# Altium PCB LEDmatrix.PcbDoc
Units mm, origin at the board's own origin, x right, y up, seen from the top; angles counter-clockwise.
Board outline 64.13 x 65.66 mm, 2 copper layers (Top Layer, Bottom Layer); 66 components, 68 nets, 194 pads, 47 vias.
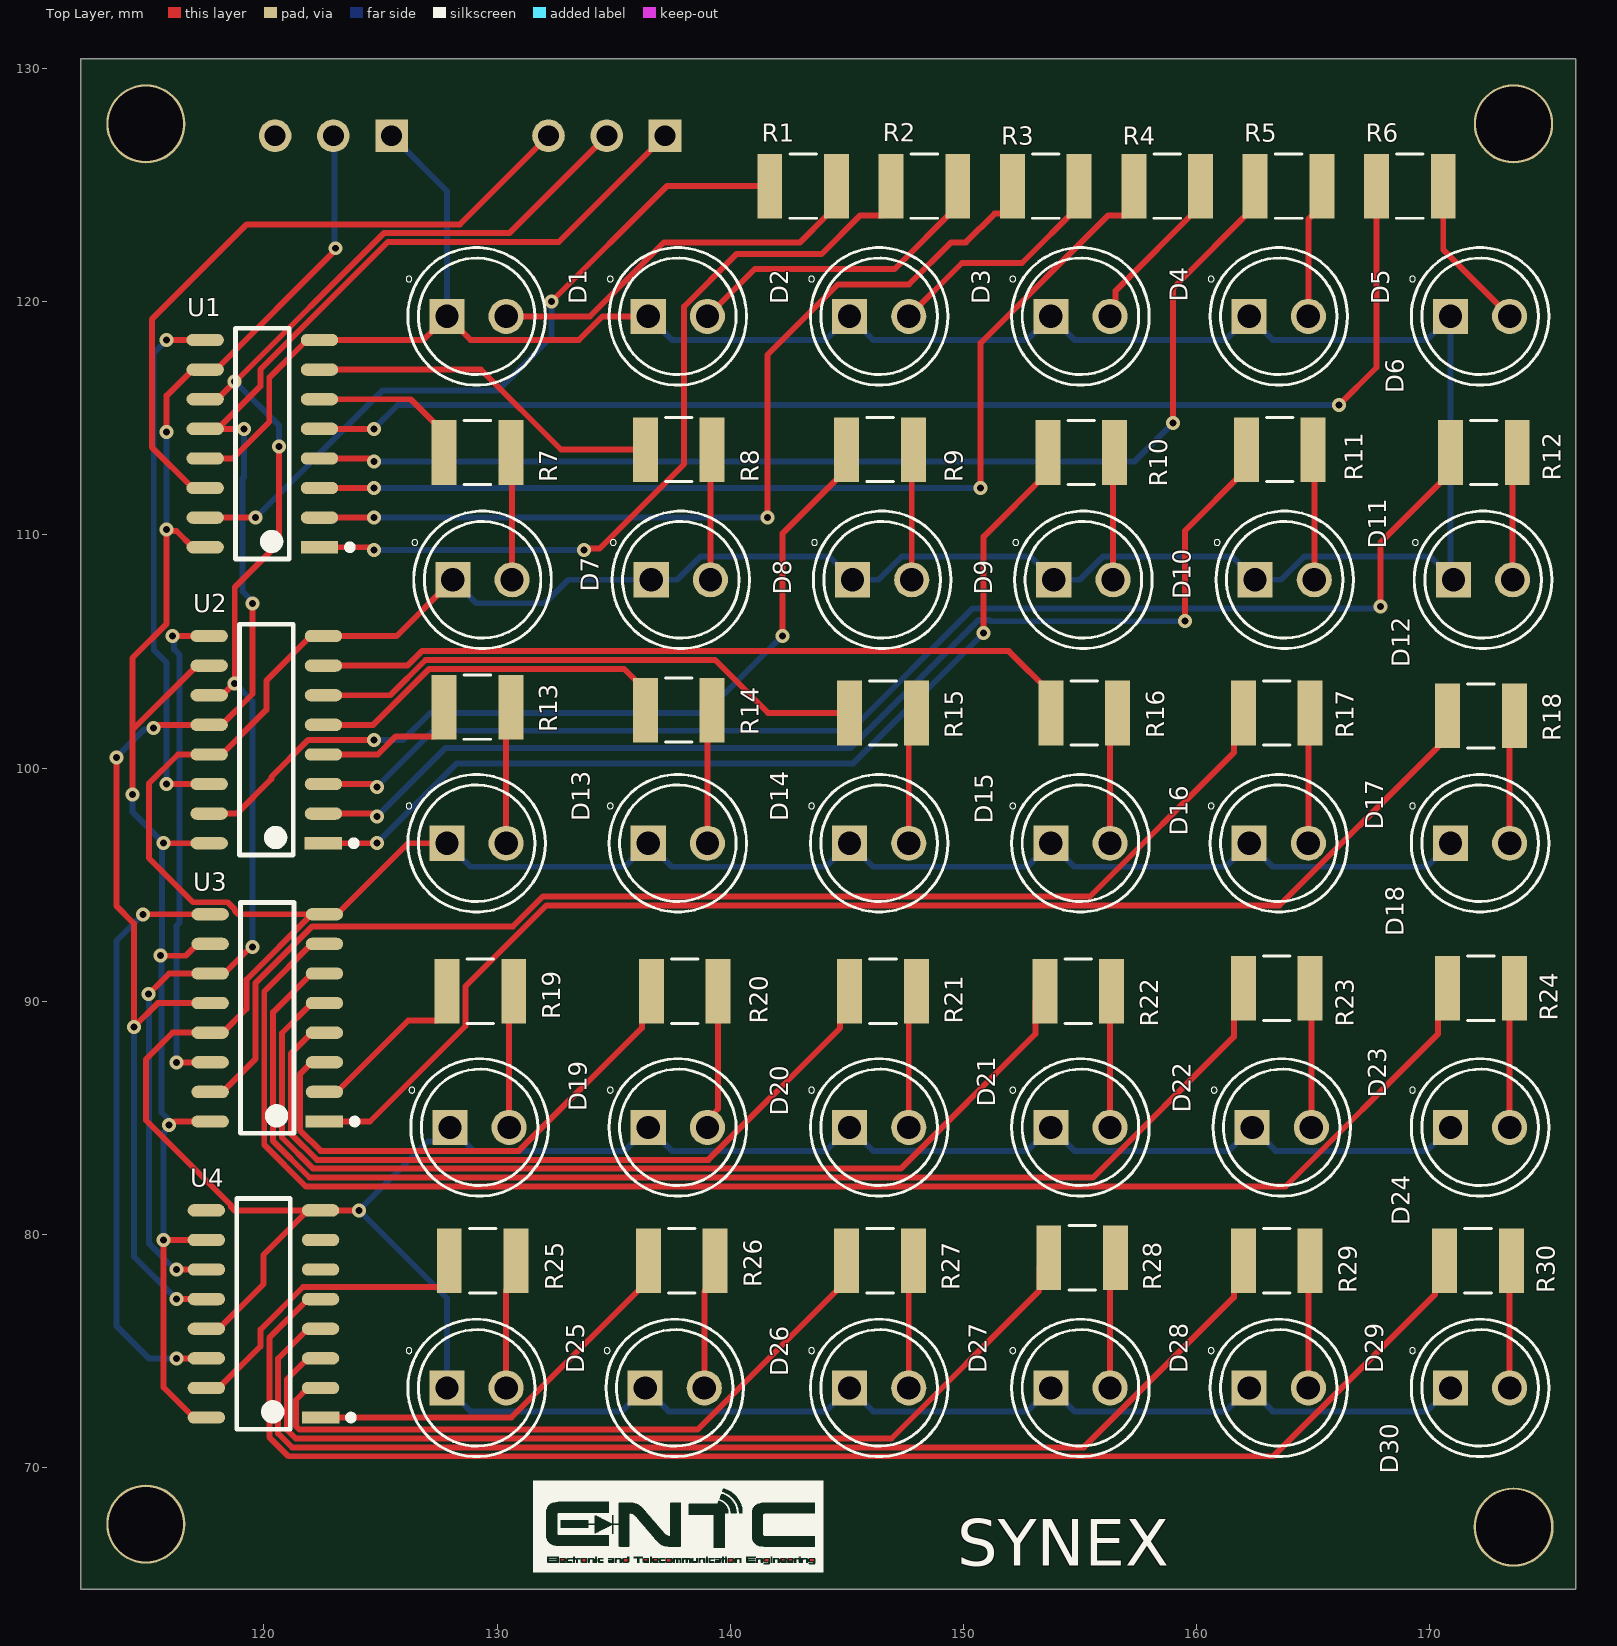
[diagram p0: Top Layer view]
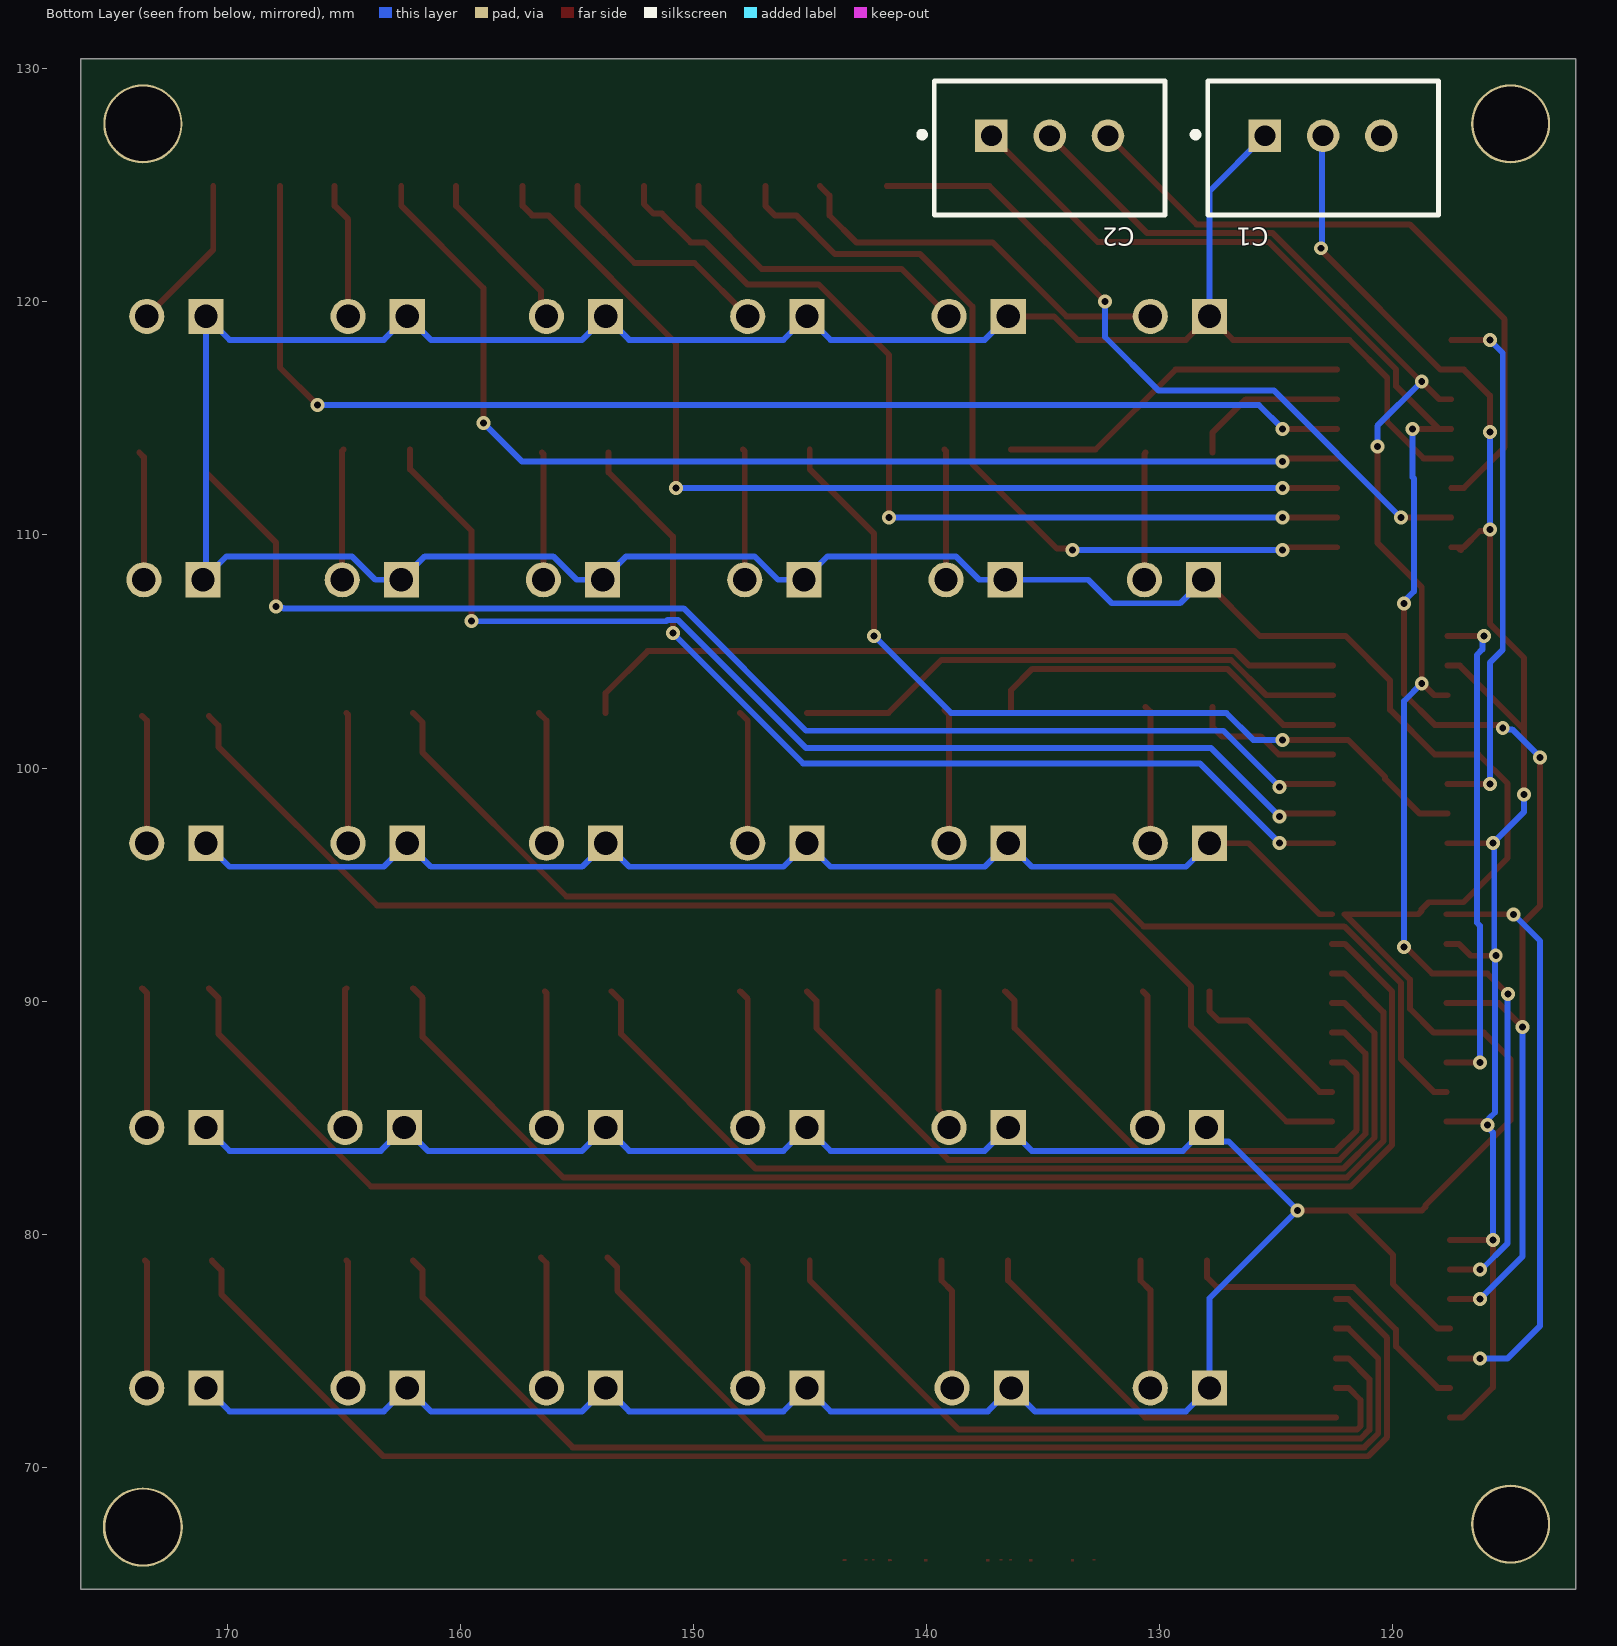
[diagram p1: Bottom Layer view, seen from below]
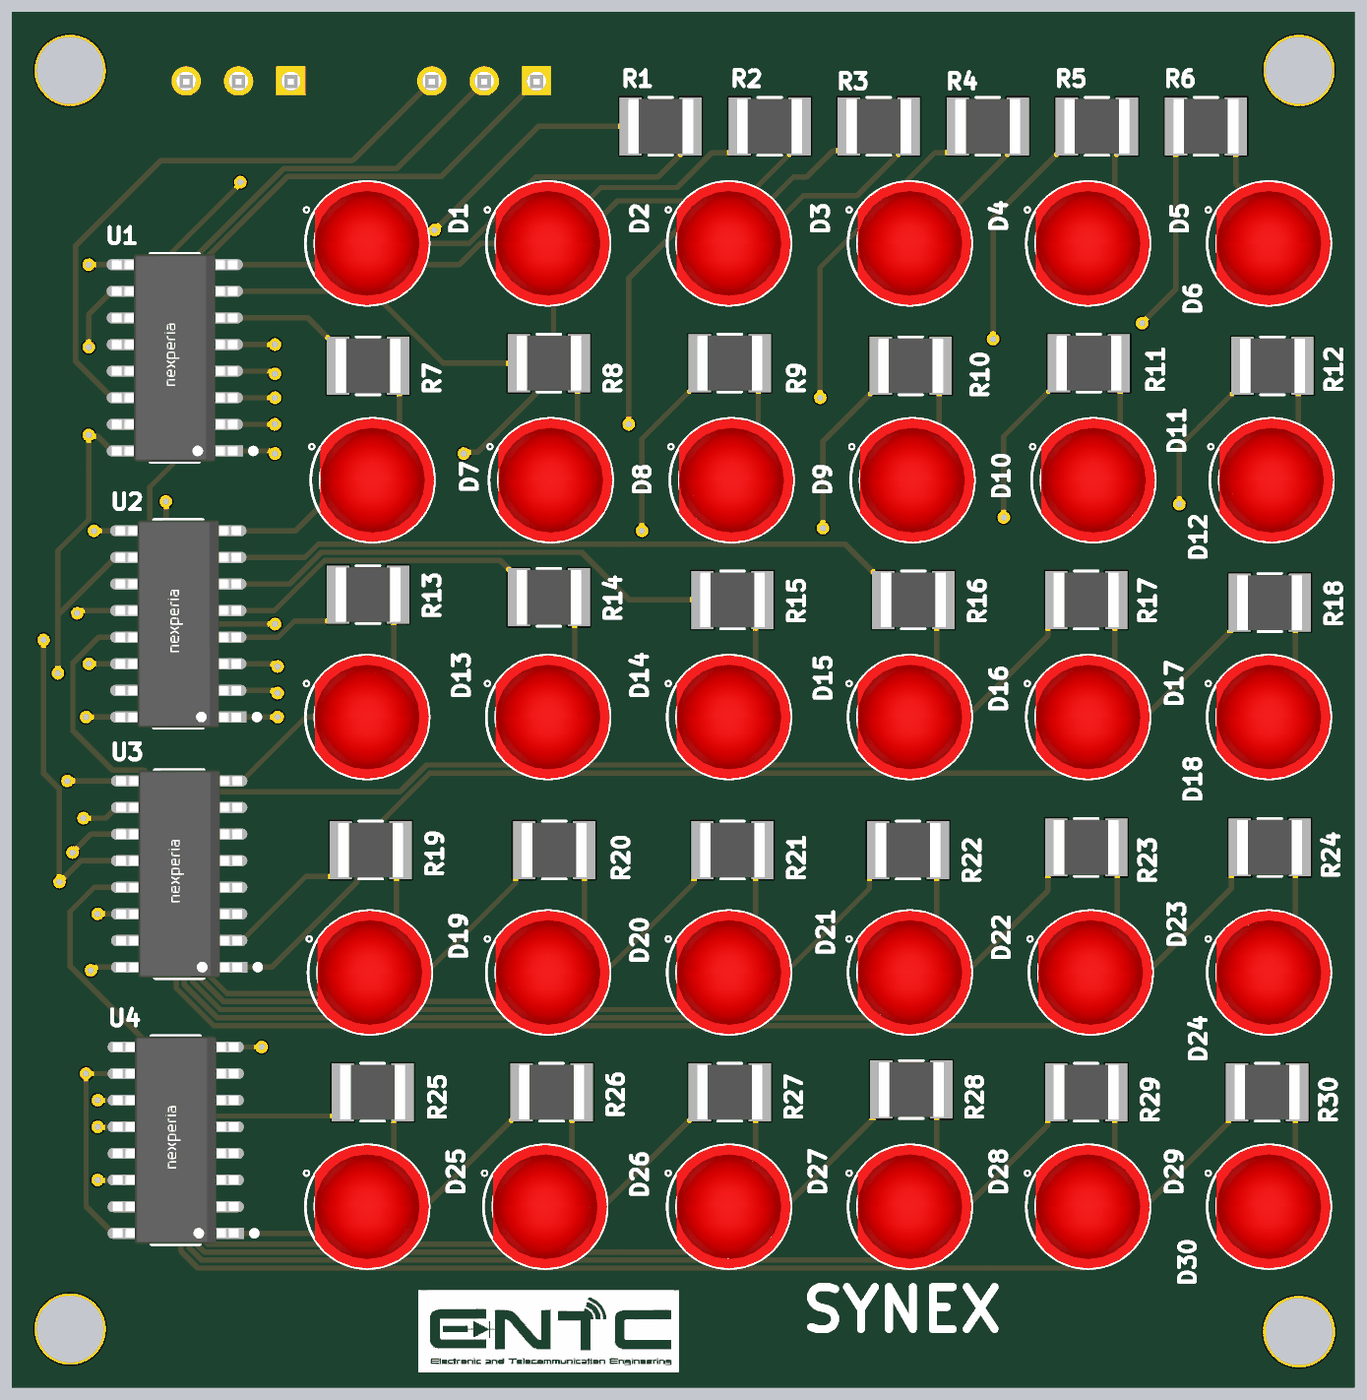
[diagram p2: 3D render of the assembled board from above, using the file's embedded part models]

## Layer stack, top to bottom
Top Solder: solder mask 0.0102, Solder Resist, Dk 3.5
Top Layer: signal copper 0.0356
Dielectric 1: dielectric 0.32, FR-4, Dk 4.8
Bottom Layer: signal copper 0.0356
Bottom Solder: solder mask 0.0102, Solder Resist, Dk 3.5

## Board outline
112.141,64.77 176.276,64.77 176.276,130.429 112.141,130.429

## Design rules (kind name [scope] priority, off if disabled: settings)
BoardOutlineClearance [All] p1: gap=0.2 ignorepadtopadclearanceinfootprint=FALSE
Clearance [All] p1: gap=0.127 ignorepadtopadclearanceinfootprint=FALSE except(0.25: Arc-Hole Track-Hole SMDPad-Hole THPad-Hole Via-Hole Fill-Hole Poly-Hole Region-Hole Text-Hole)
ComponentClearance [All] p1: gap=0.127 collisioncheckmode=3 verticalgap=0.127 showdistances=TRUE
DiffPairsRouting [All] p1: maxlimit=0.254 minlimit=0.127 mostfreqgap=0.127 toplayer_minwidth=0.127 toplayer_maxwidth=25.4 toplayer_prefwidth=0.127 bottomlayer_minwidth=0.127 bottomlayer_maxwidth=25.4 bottomlayer_prefwidth=0.127 maxuncoupledlength=12.7
Height [All] p1: minheight=0 maxheight=1816.048 prefheight=12.7
HoleSize [All] p1: absolutevalues=TRUE maxlimit=6.3 minlimit=0.3 maxpercent=80.000 minpercent=20.000
HoleToHoleClearance [All] p1: gap=0.25 allowstackedmicrovias=FALSE
MinimumAnnularRing [All] p1: minimumring=0.076
MinimumSolderMaskSliver [All] p1: minsoldermaskwidth=0
PlaneClearance [All] p1: clearance=0.127
PlaneConnect PlaneConnectPowerPads [InPadClass('PowerPads')] p1: planeconnectstyle=Direct reliefexpansion=0.508 reliefentries=4 reliefconductorwidth=0.254 reliefairgap=0.254
PlaneConnect [All] p2: pad.planeconnectstyle=Relief pad.reliefexpansion=0.3 pad.reliefentries=4 pad.reliefconductorwidth=0.127 pad.reliefairgap=0.127 via.planeconnectstyle=Direct via.reliefexpansion=0.3 via.reliefentries=4 via.reliefconductorwidth=0.127 via.reliefairgap=0.127
PolygonConnect PolygonConnectPowerPads [All vs (InPadClass('PowerPads'))] p1: connectstyle=Direct reliefconductorwidth=0.254 reliefentries=4 polygonreliefangle="90 Angle" airgapwidth=0.254
PolygonConnect [All] p2: thpad.connectstyle=Relief thpad.reliefconductorwidth=0.127 thpad.reliefentries=4 thpad.polygonreliefangle="90 Angle" thpad.airgapwidth=0.127 smdpad.connectstyle=Relief smdpad.reliefconductorwidth=0.127 smdpad.reliefentries=4 smdpad.polygonreliefangle="90 Angle" smdpad.airgapwidth=0.127 via.connectstyle=Direct via.reliefconductorwidth=0.127 via.reliefentries=4 via.polygonreliefangle="90 Angle" via.airgapwidth=0.127
RoutingVias [All] p1: holewidth=0.3 width=0.6 viastyle="Through Hole" minholewidth=0.3 minwidth=0.6 maxholewidth=0.6 maxwidth=6.6
SilkToSilkClearance [All] p1: silktosilkclearance=0
SilkToSolderMaskClearance [IsPad] p1: minsilkscreentomaskgap=0.127 clearancetoexposedcopper=TRUE
SolderMaskExpansion [All] p1: expansion=0.075 istentingtop=FALSE
SupplyNets "Schematic Supply Nets_1" [InNet('VCC')] p1: voltage=0.000
SupplyNets "Schematic Supply Nets" [InNet('GND')] p2: voltage=0.000
Width [All] p1: maxlimit=25.4 minlimit=0.127 preferedwidth=0.127 minimp=50.000000 maximp=50.000000 favimp=50.000000
20 further rules are at their usual default settings.

## Components (designator, comment, footprint, x,y, rotation, side; value= is the part's Value field where it differs from the comment)
C1 "B3B-XH-A(LF)(SN)" FP-B3B-XH-A_LF_SN-MFG 122.976,126.602 r180 bottom
C2 "B3B-XH-A(LF)(SN)" FP-B3B-XH-A_LF_SN-MFG 134.707,126.602 r180 bottom
D1 "WP7113ID" LED_WP7113ID 129.121,119.38 r0 top
D2 "WP7113ID" LED_WP7113ID 137.757,119.38 r0 top
D3 "WP7113ID" LED_WP7113ID 146.393,119.38 r0 top
D4 "WP7113ID" LED_WP7113ID 155.029,119.38 r0 top
D5 "WP7113ID" LED_WP7113ID 163.538,119.38 r0 top
D6 "WP7113ID" LED_WP7113ID 172.174,119.38 r0 top
D7 "WP7113ID" LED_WP7113ID 129.375,108.077 r0 top
D8 "WP7113ID" LED_WP7113ID 137.884,108.077 r0 top
D9 "WP7113ID" LED_WP7113ID 146.52,108.077 r0 top
D10 "WP7113ID" LED_WP7113ID 155.156,108.077 r0 top
D11 "WP7113ID" LED_WP7113ID 163.792,108.077 r0 top
D12 "WP7113ID" LED_WP7113ID 172.301,108.077 r0 top
D13 "WP7113ID" LED_WP7113ID 129.121,96.774 r0 top
D14 "WP7113ID" LED_WP7113ID 137.757,96.774 r0 top
D15 "WP7113ID" LED_WP7113ID 146.393,96.774 r0 top
D16 "WP7113ID" LED_WP7113ID 155.029,96.774 r0 top
D17 "WP7113ID" LED_WP7113ID 163.538,96.774 r0 top
D18 "WP7113ID" LED_WP7113ID 172.174,96.774 r0 top
D19 "WP7113ID" LED_WP7113ID 129.248,84.582 r0 top
D20 "WP7113ID" LED_WP7113ID 137.757,84.582 r0 top
D21 "WP7113ID" LED_WP7113ID 146.393,84.582 r0 top
D22 "WP7113ID" LED_WP7113ID 155.029,84.582 r0 top
D23 "WP7113ID" LED_WP7113ID 163.665,84.582 r0 top
D24 "WP7113ID" LED_WP7113ID 172.174,84.582 r0 top
D25 "WP7113ID" LED_WP7113ID 129.121,73.406 r0 top
D26 "WP7113ID" LED_WP7113ID 137.622,73.406 r0 top
D27 "WP7113ID" LED_WP7113ID 146.393,73.406 r0 top
D28 "WP7113ID" LED_WP7113ID 155.029,73.406 r0 top
D29 "WP7113ID" LED_WP7113ID 163.538,73.406 r0 top
D30 "WP7113ID" LED_WP7113ID 172.174,73.406 r0 top
R1 "RC1210FR-07330RL" RESC3126X65N 143.129,124.968 r0 top
R2 "RC1210FR-07330RL" RESC3126X65N 148.336,124.968 r0 top
R3 "RC1210FR-07330RL" RESC3126X65N 153.543,124.968 r0 top
R4 "RC1210FR-07330RL" RESC3126X65N 158.75,124.968 r0 top
R5 "RC1210FR-07330RL" RESC3126X65N 163.957,124.968 r0 top
R6 "RC1210FR-07330RL" RESC3126X65N 169.164,124.968 r0 top
R7 "RC1210FR-07330RL" RESC3126X65N 129.159,113.538 r0 top
R8 "RC1210FR-07330RL" RESC3126X65N 137.795,113.665 r0 top
R9 "RC1210FR-07330RL" RESC3126X65N 146.431,113.665 r0 top
R10 "RC1210FR-07330RL" RESC3126X65N 155.067,113.538 r0 top
R11 "RC1210FR-07330RL" RESC3126X65N 163.576,113.665 r0 top
R12 "RC1210FR-07330RL" RESC3126X65N 172.339,113.538 r0 top
R13 "RC1210FR-07330RL" RESC3126X65N 129.159,102.616 r0 top
R14 "RC1210FR-07330RL" RESC3126X65N 137.795,102.489 r0 top
R15 "RC1210FR-07330RL" RESC3126X65N 146.558,102.362 r0 top
R16 "RC1210FR-07330RL" RESC3126X65N 155.194,102.362 r0 top
R17 "RC1210FR-07330RL" RESC3126X65N 163.449,102.362 r0 top
R18 "RC1210FR-07330RL" RESC3126X65N 172.212,102.235 r0 top
R19 "RC1210FR-07330RL" RESC3126X65N 129.286,90.424 r0 top
R20 "RC1210FR-07330RL" RESC3126X65N 138.049,90.424 r0 top
R21 "RC1210FR-07330RL" RESC3126X65N 146.558,90.424 r0 top
R22 "RC1210FR-07330RL" RESC3126X65N 154.94,90.424 r0 top
R23 "RC1210FR-07330RL" RESC3126X65N 163.449,90.551 r0 top
R24 "RC1210FR-07330RL" RESC3126X65N 172.212,90.551 r0 top
R25 "RC1210FR-07330RL" RESC3126X65N 129.38,78.867 r0 top
R26 "RC1210FR-07330RL" RESC3126X65N 137.922,78.867 r0 top
R27 "RC1210FR-07330RL" RESC3126X65N 146.431,78.867 r0 top
R28 "RC1210FR-07330RL" RESC3126X65N 155.1,78.994 r0 top
R29 "RC1210FR-07330RL" RESC3126X65N 163.449,78.867 r0 top
R30 "RC1210FR-07330RL" RESC3126X65N 172.085,78.867 r0 top
U1 "74HC595D,118" FP-SOT109-1-IPC_C 119.93,113.919 r180 top
U2 "74HC595D,118" FP-SOT109-1-IPC_C 120.1,101.219 r180 top
U3 "74HC595D,118" FP-SOT109-1-IPC_C 120.142,89.281 r180 top
U4 "74HC595D,118" FP-SOT109-1-IPC_C 119.977,76.581 r180 top

## Footprints (in the part's own frame and the unit in brackets; to place one, negate y for a bottom-side part, rotate by r counter-clockwise, add the part's x,y. Pads: shape width x height; smd on the part's side, far side on the other; paste and mask are expansions set on the pad)
FP-B3B-XH-A_LF_SN-MFG [mm]
  rect 1.4x1.4 hole 0.9 paste-2539.97 mask+0: 1(-2.5,0.525)
  round 1.4 hole 0.9 paste-2539.97 mask+0: 2(0,0.525) 3(2.5,0.525)
  silkscreen extent -5.6,-2.88 4.95,2.88, body extent -4.95,-2.88 4.95,2.89, height 7
FP-SOT109-1-IPC_C [mm]
  rect 1.604x0.528 smd paste+0 mask+0: 1(-2.451,4.445)
  rrect100% 1.604x0.528 smd paste+0 mask+0: 2(-2.451,3.175) 3(-2.451,1.905) 4(-2.451,0.635) 5(-2.451,-0.635) 6(-2.451,-1.905) 7(-2.451,-3.175) 8(-2.451,-4.445) 9(2.451,-4.445) 10(2.451,-3.175) 11(2.451,-1.905) 12(2.451,-0.635) 13(2.451,0.635) 14(2.451,1.905) 15(2.451,3.175) 16(2.451,4.445)
  silkscreen extent -3.88,-4.95 1.15,4.95, body extent -3.35,-5.05 3.35,5.05, height 0.25
LED_WP7113ID [mm]
  round 1.508 hole 1: A(1.27,0)
  rect 1.508x1.508 / inner round 1.508 / far side rect 1.508x1.508 hole 1: C(-1.27,0)
  silkscreen extent -3.03,-2.95 2.95,2.95, body extent -2.5,-2.95 2.95,2.95, height 9.6
RESC3126X65N [mm]
  rect 1.07x2.77 smd: 1(-1.43,0) 2(1.43,0)
  silkscreen extent -0.57,-1.38 0.57,1.38, body extent -1.55,-1.3 1.55,1.3, height 0.65

## Part data
C1 C2: library part CMP-17439-000014-3, "CONN HEADER VERT 3POS 2.5MM", Color=Natural, Contact Resistance=20mR, Current Rating=3A, Flammability Rating="UL94 V-0", Housing Color=White, Insulation Resistance=1GR, Max Operating Temperature=85°C, Max Voltage Rating (AC)=250V, Min Operating Temperature=-25°C, Connector Type=Header, Contact Finish - Mating=TIN, Contact Material=Brass, Contact Plating=Tin, Contact Shape=Square, Contact Type="Male Pin", Depth=5.75mm, Fastening Type=Detent, Gender=Male, Housing Material=Polyamide, Insulation Color=Natural, Insulation Material=Nylon, Lead Free="Lead Free", Lead Pitch=2.5mm, Length=9.9mm, Max Current Rating=3A, Max Voltage Rating (DC)=250V, Mount="Through Hole", Number of Contacts=3, Number of Positions=3, Number of Rows=1, Orientation=Straight, Packaging=Bulk, Pitch=2.5mm, REACH SVHC="No SVHC", Series=XH, Termination=Solder, Voltage Rating=250V, Voltage Rating (AC)=250V, Wire/Cable Gauge=22AWG
D1 D2 D3 D4 D5 D6 D7 D8 D9 D10 D11 D12 D13 D14 D15 D16 D17 D18 D19 D20 D21 D22 D23 D24 D25 D26 D27 D28 D29 D30: "Red 617nm LED Indication - Discrete 2V Radial", Package="Radial Kingbright", Availability="In Stock", Check_prices=https://www.snapeda.com/parts/WP7113ID/Kingbright/view-part/?ref=eda, MF=Kingbright, MP=WP7113ID, Price=None, Purchase-URL=https://pricing.snapeda.com/search/part/WP7113ID/?ref=eda, SnapEDA_Link=https://www.snapeda.com/parts/WP7113ID/Kingbright/view-part/?ref=snap
R1 R2 R3 R4 R5 R6 R7 R8 R9 R10 R11 R12 R13 R14 R15 R16 R17 R18 R19 R20 R21 R22 R23 R24 R25 R26 R27 R28 R29 R30: "330 Ohms Â±1% 0.5W, 1/2W Chip Resistor 1210 (3225 Metric) Moisture Resistant Thick Film", Package="3126 Yageo", Check_prices=https://www.snapeda.com/parts/RC1210FR-07330RL/Yageo/view-part/?ref=eda, MF=Yageo, MP=RC1210FR-07330RL, SnapEDA_Link=https://www.snapeda.com/parts/RC1210FR-07330RL/Yageo/view-part/?ref=snap
U1 U2 U3 U4: library part CMP-14351-000006-1, "IC SHIFT REGISTER 8BIT 16SOIC", RoHS Compliant=Yes

## Free pads (board coordinates)
  round 3.4 hole 3.2: 12(114.935,127.635) 13(114.935,67.564) 15(173.609,127.635)
  oval 3.44x3.4 hole 3.2: 14(173.609,67.437)

## Via types
v1: diameter 0.6, hole 0.3, Top Layer to Bottom Layer, 47 vias

## Nets (pads, with @x,y where several pads share a name; then routed paths per layer and width w, separated by ;. In a path a pad name is that pad's centre, name@x,y a point inside that pad or via, vN(x,y) a via of type N, cw(c..) or ccw(c..) an arc to the next point about the centre after c; other vN are vias at no path point)
C1: U1.9 U2.14 | length 23
  Top Layer w0.254: v1(115.824,99.314) U2.14 ; v1(115.824,118.364) U1.9
  Bottom Layer w0.254: v1(115.824,99.314) 115.824,104.521 115.27,105.075 115.27,117.81 v1(115.824,118.364)
GND: C1.1 D1.C D2.C D3.C D4.C D5.C D6.C D7.C D8.C D9.C D10.C D11.C D12.C D13.C D14.C D15.C D16.C D17.C D18.C D19.C D20.C D21.C D22.C D23.C D24.C D25.C D26.C D27.C D28.C D29.C D30.C U1.8 U1.13 U2.8 U2.13 U3.8 U3.13 U4.8 U4.13 | length 350.7
  Top Layer w0.254: U1.13 118.662,113.284 120.226,114.848 120.226,116.748 121.843,118.364 U1.8 126.835,118.364 D1.C 128.859,118.372 133.516,118.372 134.524,119.38 D2.C ; U4.13 118.064,75.946 119.977,77.859 119.977,79.113 U4.8@121.89,81.026 ; U3.8 123.131,93.726 126.179,96.774 D13.C ; v1(124.079,81.026) U4.8 U4.8@121.89,81.026 ; D7.C 125.692,105.664 U2.8 122.013,105.664 120.1,103.751 120.1,102.497 118.187,100.584 U2.13 116.311,100.584 115.062,99.335 115.062,96.139 116.957,94.244 118.444,94.244 118.747,93.941 118.747,93.875 118.896,93.726 122.053,93.726 119.251,90.923 119.251,89.667 118.229,88.646 U3.13 116.078,88.646 114.935,87.503 114.935,84.888 118.582,81.241 118.582,81.175 118.731,81.026 U4.8@121.89,81.026
  Bottom Layer w0.254: C1.1 127.851,124.752 D1.C ; D13.C 128.859,95.766 135.479,95.766 D14.C 137.495,95.766 144.115,95.766 D15.C 146.131,95.766 152.751,95.766 D16.C 154.767,95.766 161.26,95.766 D17.C 163.276,95.766 169.896,95.766 D18.C ; D7.C 129.113,107.069 132.046,107.069 133.054,108.077 D8.C 137.728,108.077 138.736,109.085 144.242,109.085 D9.C 146.364,108.077 147.372,109.085 152.878,109.085 D10.C 155,108.077 156.008,109.085 161.514,109.085 D11.C 163.636,108.077 164.644,109.085 170.023,109.085 D12.C 170.904,108.204 D6.C 169.896,118.372 163.276,118.372 D5.C 161.26,118.372 154.767,118.372 D4.C 152.751,118.372 146.131,118.372 D3.C 144.115,118.372 137.495,118.372 D2.C ; D30.C 169.896,72.398 163.276,72.398 D29.C 161.26,72.398 154.767,72.398 D28.C 152.751,72.398 146.131,72.398 D27.C 144.115,72.398 137.36,72.398 D26.C 135.344,72.398 128.859,72.398 D25.C 127.851,77.254 v1(124.079,81.026) 127.037,83.984 127.38,83.984 D19.C 128.986,83.574 135.479,83.574 D20.C 137.495,83.574 144.115,83.574 D21.C 146.131,83.574 152.751,83.574 D22.C 154.767,83.574 161.387,83.574 D23.C 163.403,83.574 169.896,83.574 D24.C
MCU_Clock: C2.2 U1.11 U2.11 U3.11 U4.11 | length 68.3
  Top Layer w0.254: v1(115.051,90.308) 115.93,91.186 U3.11 118.297,91.186 119.44,92.329 v1(119.507,92.329) ; v1(116.251,78.486) U4.11 ; U1.11 118,115.824 118.745,116.569 v1(118.745,116.586) 118.779,116.586 125.141,122.947 130.527,122.947 C2.2 ; U2.11 118.212,103.124 118.72,103.632 v1(118.745,103.632) 118.745,107.759 120.65,109.664 v1(120.65,113.792)
  Bottom Layer w0.254: v1(115.051,90.308) 115.062,90.297 115.062,79.608 116.184,78.486 v1(116.251,78.486) ; v1(118.745,103.632) 119.507,102.87 v1(119.507,92.329) ; v1(118.745,116.586) 120.65,114.681 v1(120.65,113.792)
MCU_Data: C2.3 U1.14 | length 28.8
  Top Layer w0.254: U1.14 116.941,112.014 115.189,113.766 115.189,119.253 119.264,123.328 128.408,123.328 C2.3
MCU_Latch: C2.1 U1.12 U2.12 U3.12 U4.12 | length 74.3
  Top Layer w0.254: v1(113.665,100.457) 113.665,94.086 114.427,93.324 v1(114.427,88.9) 115.443,89.916 U3.12 ; v1(115.27,101.727) 115.364,101.727 115.491,101.854 118.187,101.854 119.507,103.174 v1(119.507,107.061) ; v1(116.251,77.216) U4.12 ; U1.12 117.485,114.548 119.132,114.548 v1(119.137,114.543) ; U1.12@118.017,114.554 119.845,116.382 119.845,117.099 125.312,122.566 132.646,122.566 C2.1
  Bottom Layer w0.254: v1(113.665,100.457) 114.869,101.661 115.204,101.661 v1(115.27,101.727) ; v1(114.427,88.9) 114.427,79.04 v1(116.251,77.216) ; v1(119.137,114.543) 119.137,112.477 119.08,112.42 119.08,107.582 119.507,107.155 v1(119.507,107.061)
NetD1_A: D1.A R1.2 | length 17
  Top Layer w0.254: D1.A 133.985,119.38 137.16,122.555 143.002,122.555 144.151,123.704 144.151,124.56 R1.2
NetD2_A: D2.A R2.2 | length 13.6
  Top Layer w0.254: D2.A 141.059,121.412 147.06,121.412 149.766,124.118 R2.2
NetD3_A: D3.A R3.2 | length 10.1
  Top Layer w0.254: D3.A 149.948,121.665 152.52,121.665 154.973,124.118 R3.2
NetD4_A: D4.A R4.2 | length 7.2
  Top Layer w0.254: D4.A 156.539,119.62 156.539,120.477 160.18,124.118 R4.2
NetD5_A: D5.A R5.2 | length 5.8
  Top Layer w0.254: D5.A 164.808,123.539 165.387,124.118 R5.2
NetD6_A: D6.A R6.2 | length 6.8
  Top Layer w0.254: R6.2 170.594,122.23 D6.A
NetD7_A: D7.A R7.2 | length 5.5
  Top Layer w0.254: R7.2 130.645,113.482 D7.A
NetD8_A: D8.A R8.2 | length 5.6
  Top Layer w0.254: D8.A 139.154,113.594 R8.2
NetD9_A: D9.A R9.2 | length 5.6
  Top Layer w0.254: D9.A 147.79,113.594 R9.2
NetD10_A: D10.A R10.2 | length 5.5
  Top Layer w0.254: D10.A 156.426,113.467 R10.2
NetD11_A: D11.A R11.2 | length 5.6
  Top Layer w0.254: R11.2 165.062,113.609 D11.A
NetD12_A: D12.A R12.2 | length 5.5
  Top Layer w0.254: D12.A 173.571,113.34 R12.2
NetD13_A: D13.A R13.2 | length 5.9
  Top Layer w0.254: D13.A 130.391,102.418 R13.2
NetD14_A: D14.A R14.2 | length 5.8
  Top Layer w0.254: D14.A 139.027,102.291 R14.2
NetD15_A: D15.A R15.2 | length 5.7
  Top Layer w0.254: D15.A 147.663,102.037 R15.2
NetD16_A: D16.A R16.2 | length 5.7
  Top Layer w0.254: D16.A 156.299,102.037 R16.2
NetD17_A: D17.A R17.2 | length 5.6
  Top Layer w0.254: D17.A 164.808,102.291 R17.2
NetD18_A: D18.A R18.2 | length 5.5
  Top Layer w0.254: D18.A 173.444,102.037 R18.2
NetD19_A: D19.A R19.2 | length 5.9
  Top Layer w0.254: D19.A 130.518,90.226 R19.2
NetD20_A: D20.A R20.2 | length 6
  Top Layer w0.254: D20.A 139.027,84.921 139.479,85.373 R20.2
NetD21_A: D21.A R21.2 | length 6
  Top Layer w0.254: D21.A 147.663,90.099 R21.2
NetD22_A: D22.A R22.2 | length 5.9
  Top Layer w0.254: D22.A 156.299,90.353 R22.2
NetD23_A: D23.A R23.2 | length 6
  Top Layer w0.254: R23.2 164.935,90.495 D23.A
NetD24_A: D24.A R24.2 | length 6.1
  Top Layer w0.254: D24.A 173.444,90.353 R24.2
NetD25_A: D25.A R25.2 | length 5.6
  Top Layer w0.254: D25.A 130.391,77.598 130.81,78.017 R25.2
NetD26_A: D26.A R26.2 | length 5.7
  Top Layer w0.254: D26.A 138.892,77.557 139.352,78.017 R26.2
NetD27_A: D27.A R27.2 | length 5.5
  Top Layer w0.254: D27.A 147.663,78.669 R27.2
NetD28_A: D28.A R28.2 | length 5.7
  Top Layer w0.254: D28.A 156.299,78.763 R28.2
NetD29_A: D29.A R29.2 | length 5.5
  Top Layer w0.254: D29.A 164.808,78.796 R29.2
NetD30_A: D30.A R30.2 | length 5.5
  Top Layer w0.254: D30.A 173.444,78.796 R30.2
NetU2_9: U2.9 U3.14 | length 21.5
  Top Layer w0.254: v1(116.078,105.664) U2.9 ; v1(116.251,87.376) U3.14
  Bottom Layer w0.254: v1(116.078,105.664) 116.144,105.598 116.144,105.09 116.378,104.856 116.378,93.362 116.251,93.235 v1(116.251,87.376)
NetU3_9: U3.9 U4.14 | length 25.4
  Top Layer w0.254: v1(114.808,93.726) U3.9 ; v1(116.251,74.676) U4.14
  Bottom Layer w0.254: v1(114.808,93.726) 113.665,92.583 113.665,76.073 115.062,74.676 v1(116.251,74.676)
r1c1: R1.1 U1.15 | length 31
  Top Layer w0.254: U1.15 v1(119.634,110.744) ; v1(132.334,120.015) 137.287,124.968 R1.1
  Bottom Layer w0.254: v1(119.634,110.744) 125.095,116.205 130.048,116.205 132.334,118.491 v1(132.334,120.015)
r1c2: R2.1 U1.1 | length 35.5
  Top Layer w0.254: U1.1 124.493,109.474 124.62,109.347 v1(124.714,109.347) ; v1(133.731,109.347) 133.797,109.413 134.392,109.413 138.019,113.04 138.019,119.798 140.267,122.046 143.916,122.046 145.58,123.71 146.498,123.71 146.906,124.118 R2.1
  Bottom Layer w0.254: v1(124.714,109.347) v1(133.731,109.347)
r1c3: R3.1 U1.2 | length 40.2
  Top Layer w0.254: U1.2 v1(124.714,110.744) ; v1(141.605,110.744) 141.605,117.729 144.628,120.753 147.677,120.753 149.479,122.555 150.114,122.555 151.346,123.787 151.705,123.787 152.113,124.195 R3.1
  Bottom Layer w0.254: v1(124.714,110.744) v1(141.605,110.744)
r1c4: R4.1 U1.3 | length 44.4
  Top Layer w0.254: U1.3 v1(124.714,112.014) ; v1(150.749,112.014) 150.749,118.237 156.222,123.71 156.912,123.71 157.32,124.118 R4.1
  Bottom Layer w0.254: v1(124.714,112.014) v1(150.749,112.014)
r1c5: R5.1 U1.4 | length 49
  Top Layer w0.254: U1.4 124.493,113.284 124.62,113.157 v1(124.714,113.157) ; v1(159.004,114.808) 159.004,120.595 162.527,124.118 R5.1
  Bottom Layer w0.254: v1(124.714,113.157) 157.353,113.157 v1(159.004,114.808)
r1c6: R6.1 U1.5 | length 54.2
  Top Layer w0.254: U1.5 v1(124.714,114.554) ; v1(166.116,115.57) 167.734,117.188 R6.1
  Bottom Layer w0.254: v1(124.714,114.554) 125.73,115.57 v1(166.116,115.57)
r2c1: R7.1 U1.6 | length 6.8
  Top Layer w0.254: U1.6 126.293,115.824 127.729,114.388 R7.1
r2c2: R8.1 U1.7 | length 15.4
  Top Layer w0.254: U1.7 129.312,117.094 132.741,113.665 R8.1
r2c3: R9.1 U2.15 | length 36.9
  Top Layer w0.254: U2.15 118.832,98.044 120.315,99.527 120.315,99.619 121.906,101.21 v1(124.723,101.21) ; v1(142.24,105.664) 142.24,110.054 145.001,112.815 R9.1
  Bottom Layer w0.254: v1(124.723,101.21) 125.975,101.21 127.127,102.362 138.938,102.362 v1(142.24,105.664)
r2c4: R10.1 U2.1 | length 41
  Top Layer w0.254: U2.1 v1(124.841,96.774) ; v1(150.876,105.791) 150.876,109.927 153.637,112.688 R10.1
  Bottom Layer w0.254: v1(124.841,96.774) 128.27,100.203 145.288,100.203 v1(150.876,105.791)
r2c5: R11.1 U2.2 | length 49
  Top Layer w0.254: U2.2 124.62,98.044 124.747,97.917 v1(124.841,97.917) ; v1(159.512,106.299) 159.512,110.181 162.146,112.815 R11.1
  Bottom Layer w0.254: v1(124.841,97.917) 127.778,100.854 145.156,100.854 150.647,106.345 151.105,106.345 151.151,106.299 v1(159.512,106.299)
r2c6: R12.1 U2.3 | length 56.5
  Top Layer w0.254: U2.3 124.62,99.314 124.747,99.187 v1(124.841,99.187) ; v1(167.894,106.934) 167.894,109.673 170.909,112.688 R12.1
  Bottom Layer w0.254: v1(124.841,99.187) 127.254,101.6 145.161,101.6 150.414,106.853 167.572,106.853 167.587,106.868 167.828,106.868 v1(167.894,106.934)
r3c1: R13.1 U2.4 | length 6.5
  Top Layer w0.254: U2.4 124.881,100.584 125.655,101.358 127.321,101.358 127.729,101.766 R13.1
r3c2: R14.1 U2.5 | length 16
  Top Layer w0.254: U2.5 124.688,101.854 127.089,104.255 135.449,104.255 136.365,103.339 R14.1
r3c3: R15.1 U2.6 | length 24.1
  Top Layer w0.254: U2.6 125.419,103.124 126.931,104.636 139.357,104.636 141.631,102.362 R15.1
r3c4: R16.1 U2.7 | length 33.1
  Top Layer w0.254: U2.7 126.15,104.394 126.773,105.017 151.959,105.017 153.764,103.212 R16.1
r3c5: R17.1 U3.15 | length 53.7
  Top Layer w0.254: U3.15 118.229,86.106 119.632,87.508 119.632,90.766 122.074,93.208 130.682,93.208 131.962,94.488 155.438,94.488 161.611,100.661 161.611,101.954 R17.1
r3c6: R18.1 U3.1 | length 56.9
  Top Layer w0.254: U3.1 124.547,84.836 128.645,88.934 128.645,90.632 132.12,94.107 163.566,94.107 170.374,100.915 170.374,101.827 R18.1
r4c1: R19.1 U3.2 | length 7.5
  Top Layer w0.254: U3.2 123.131,86.106 126.191,89.166 127.448,89.166 127.856,89.574 R19.1
r4c2: R20.1 U3.3 | length 22.6
  Top Layer w0.254: U3.3 122.055,87.376 121.537,86.858 121.537,84.467 122.429,83.574 130.935,83.574 136.211,88.85 136.211,90.016 R20.1
r4c3: R21.1 U3.4 | length 33.4
  Top Layer w0.254: U3.4 122.055,88.646 121.156,87.747 121.156,84.309 122.272,83.193 139.063,83.193 144.72,88.85 144.72,90.016 R21.1
r4c4: R22.1 U3.5 | length 44.1
  Top Layer w0.254: U3.5 122.055,89.916 120.775,88.636 120.775,84.151 122.114,82.812 147.318,82.812 153.102,88.596 153.102,90.016 R22.1
r4c5: R23.1 U3.6 | length 55
  Top Layer w0.254: U3.6 122.055,91.186 120.394,89.525 120.394,83.993 121.956,82.431 155.573,82.431 161.611,88.469 161.611,90.143 R23.1
r4c6: R24.1 U3.7 | length 65.9
  Top Layer w0.254: U3.7 122.055,92.456 120.013,90.414 120.013,83.836 121.798,82.05 163.828,82.05 170.374,88.596 170.374,90.143 R24.1
r5c1: R25.1 U4.15 | length 13.5
  Top Layer w0.254: U4.15 118.064,73.406 119.848,75.189 119.848,75.907 121.675,77.734 127.542,77.734 127.95,78.142 R25.1
r5c2: R26.1 U4.1 | length 17.3
  Top Layer w0.254: U4.1 130.611,72.136 136.492,78.017 R26.1
r5c3: R27.1 U4.2 | length 29.6
  Top Layer w0.254: U4.2 121.89,73.406 121.372,72.888 121.372,71.767 121.521,71.618 138.602,71.618 145.001,78.017 R27.1
r5c4: R28.1 U4.3 | length 40.6
  Top Layer w0.254: U4.3 121.89,74.676 120.991,73.777 120.991,71.609 121.363,71.237 146.919,71.237 153.262,77.58 153.262,78.586 R28.1
r5c5: R29.1 U4.4 | length 51.2
  Top Layer w0.254: U4.4 121.89,75.946 120.61,74.666 120.61,71.451 121.205,70.856 155.174,70.856 161.611,77.293 161.611,78.459 R29.1
r5c6: R30.1 U4.5 | length 62
  Top Layer w0.254: U4.5 121.89,77.216 120.229,75.555 120.229,71.293 121.047,70.475 163.302,70.475 170.247,77.42 170.247,78.459 R30.1
VCC: C1.2 U1.10 U1.16 U2.10 U2.16 U3.10 U3.16 U4.10 U4.16 | length 75.6
  Top Layer w0.254: v1(114.353,98.859) 114.353,104.722 115.824,106.193 v1(115.824,110.236) 115.89,110.17 116.245,110.17 116.941,109.474 U1.16@117.194,109.474 ; 114.353,101.636 117.111,104.394 U2.10 ; v1(115.57,91.948) 116.645,91.948 117.153,92.456 U3.10 ; v1(115.697,96.774) U2.16 ; v1(115.824,114.427) 115.824,115.977 116.941,117.094 U1.10 117.943,117.094 123.063,122.214 v1(123.063,122.301) ; v1(115.924,84.682) 116.018,84.682 116.172,84.836 U3.16 ; U1.16@117.068,109.347 U1.16@117.194,109.474 ; U1.16 U1.16@117.194,109.474 ; U4.16 116.988,72.136 115.697,73.427 v1(115.697,79.756) U4.10
  Bottom Layer w0.254: v1(114.353,98.859) 114.353,98.118 v1(115.697,96.774) 115.633,96.71 115.633,92.011 v1(115.57,91.948) 115.605,91.913 115.605,85.223 115.858,84.97 115.858,84.748 v1(115.924,84.682) ; v1(115.697,79.756) 115.697,84.361 v1@115.924,84.589 ; v1(115.824,110.236) v1(115.824,114.427) ; C1.2 123.019,127.083 123.019,122.345 v1(123.063,122.301)
pads on no net: C1.3 U4.6 U4.7 U4.9

## Other copper
Top Layer:
  region: 142.242,66.05 142.33,66.05 142.33,66.02 142.242,66.02 142.242,66.035
  region: 132.761,66.035 132.761,66.05 132.864,66.05 132.864,66.02 132.761,66.02
  region: 134.963,65.976 134.963,65.962 134.845,65.962 134.845,65.976 134.948,65.976
  region: 139.454,65.976 139.542,65.976 139.542,65.962 139.424,65.962 139.424,65.976 139.439,65.976
  region: 137.428,65.976 137.428,65.962 137.311,65.962 137.311,66.05 137.428,66.05 137.428,65.991
  region: 133.686,65.962 133.671,65.962 133.671,66.05 133.789,66.05 133.789,65.962 133.7,65.962
  region: 142.609,66.02 142.536,66.02 142.536,66.05 142.639,66.05 142.639,66.02 142.624,66.02
  region: 140.012,66.05 140.085,66.05 140.085,66.035 140.1,66.035 140.1,65.962 139.967,65.962 139.967,66.05 139.997,66.05
  region: 136.797,66.02 136.753,66.02 136.753,66.05 136.841,66.05 136.841,66.02 136.812,66.02
  region: 135.506,66.05 135.579,66.05 135.579,65.962 135.462,65.962 135.462,65.976 135.447,65.976 135.447,66.035 135.462,66.035 135.462,66.05 135.491,66.05
  region: 143.563,66.05 143.563,66.035 143.578,66.035 143.578,65.991 143.446,65.991 143.446,66.05 143.549,66.05
  region: 136.342,66.05 136.43,66.05 136.43,66.035 136.445,66.035 136.445,66.02 136.342,66.02 136.342,66.035
  region: 141.509,66.035 141.509,66.05 141.626,66.05 141.626,65.991 141.611,65.991 141.611,65.976 141.597,65.976 141.597,65.991 141.494,65.991 141.494,66.02 141.509,66.02

## Silkscreen, mask and mechanical layers (free items; w line width, h text height)
Top Overlay:
  region: 5 vertices and 48 holes, not listed, extent 131.558,65.492 144.004,69.425
  text "SYNEX" at 149.733,65.786 h2